# Altium PCB MC_PCB.PcbDoc
Units mil, origin at the board's own origin, x right, y up, seen from the top; angles counter-clockwise.
Board outline 2952.76 x 2755.91 mil, 2 copper layers (Top Layer, Bottom Layer); 48 components, 32 nets, 133 pads, 82 vias.
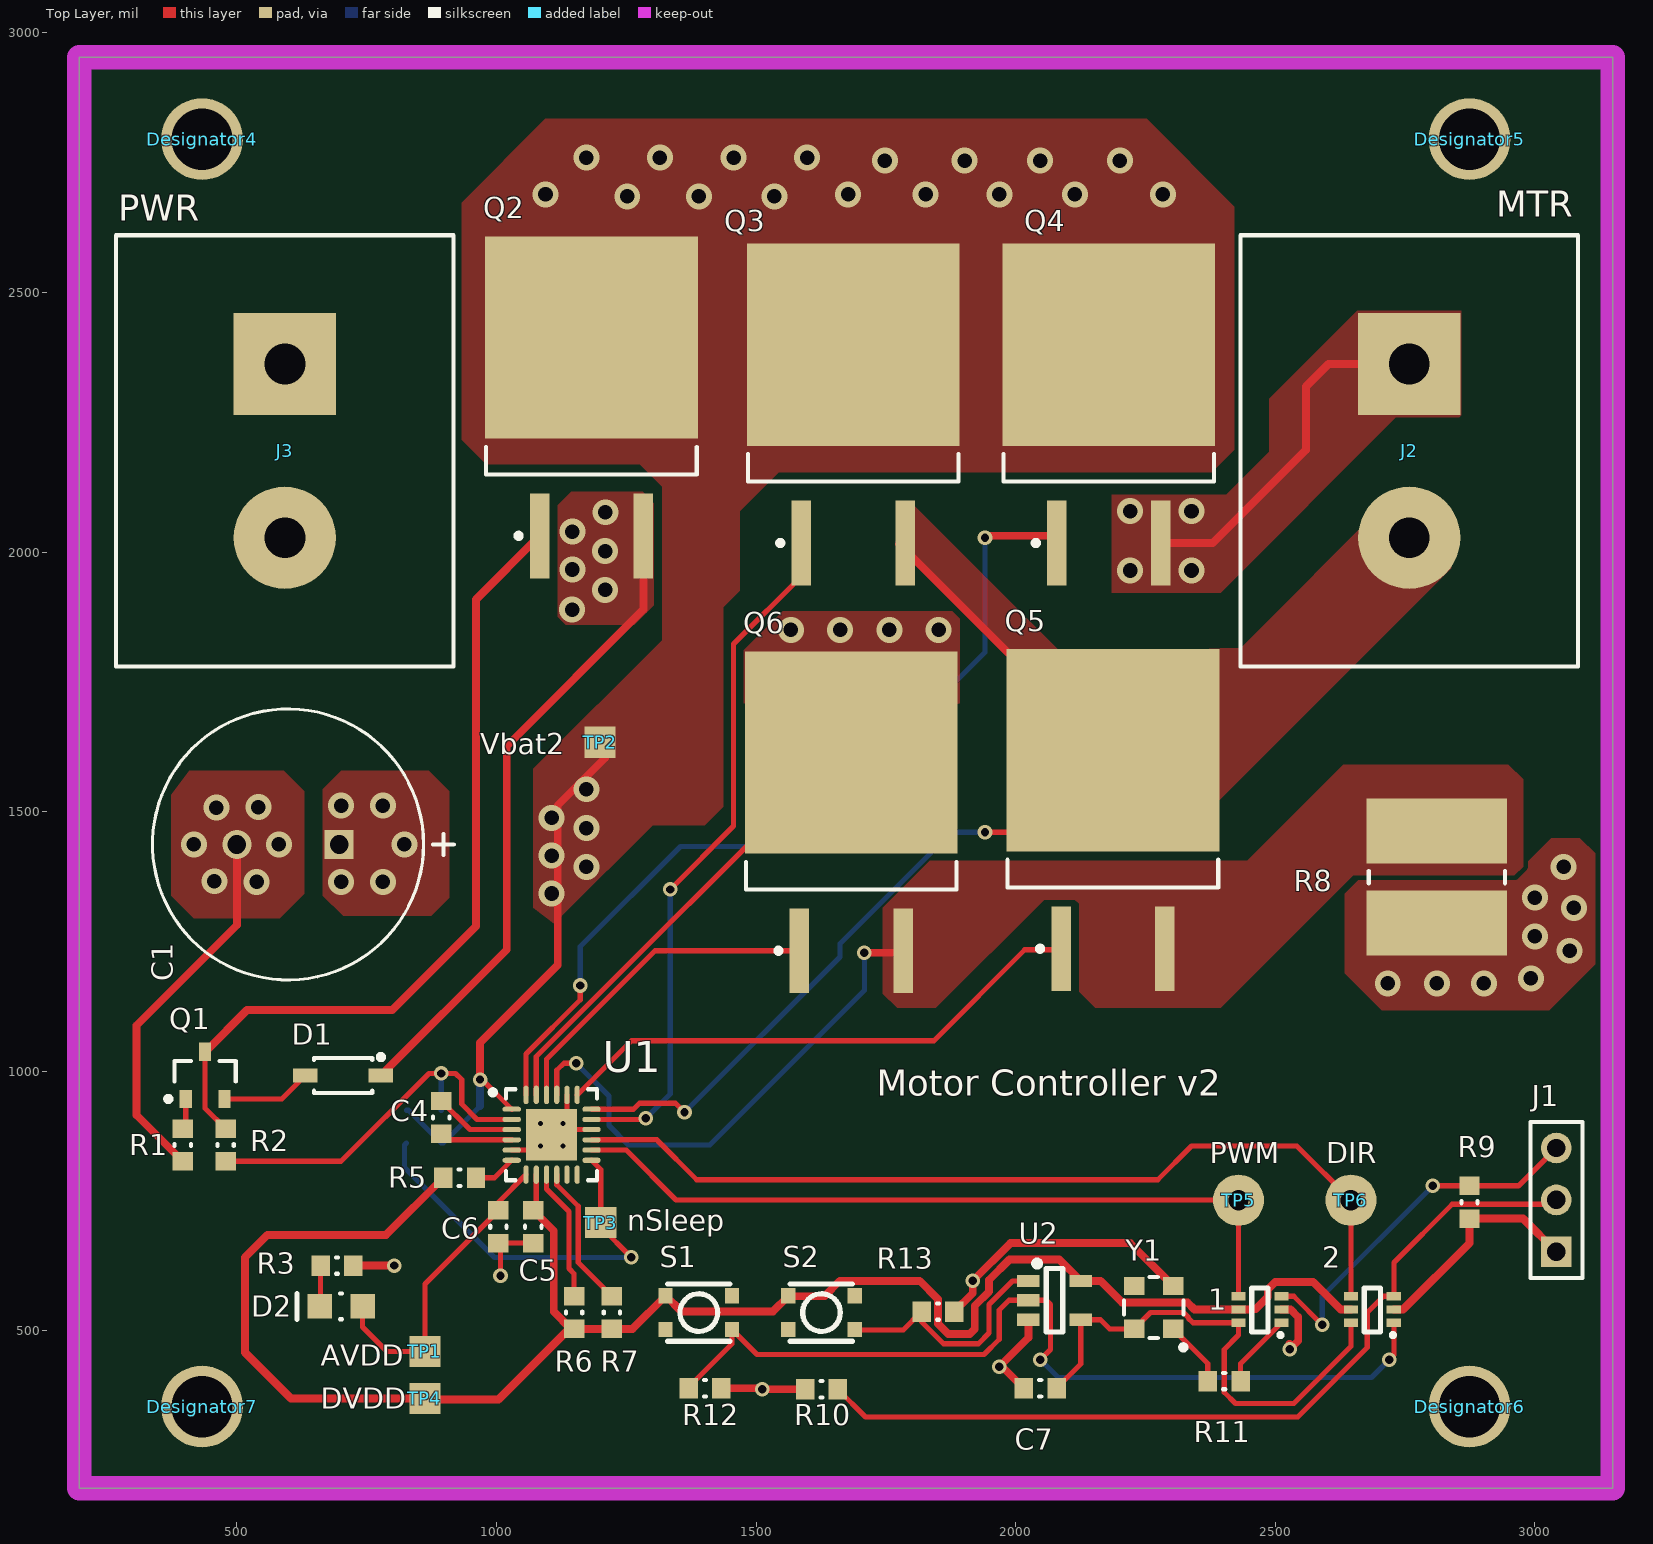
[diagram p0: Top Layer view]
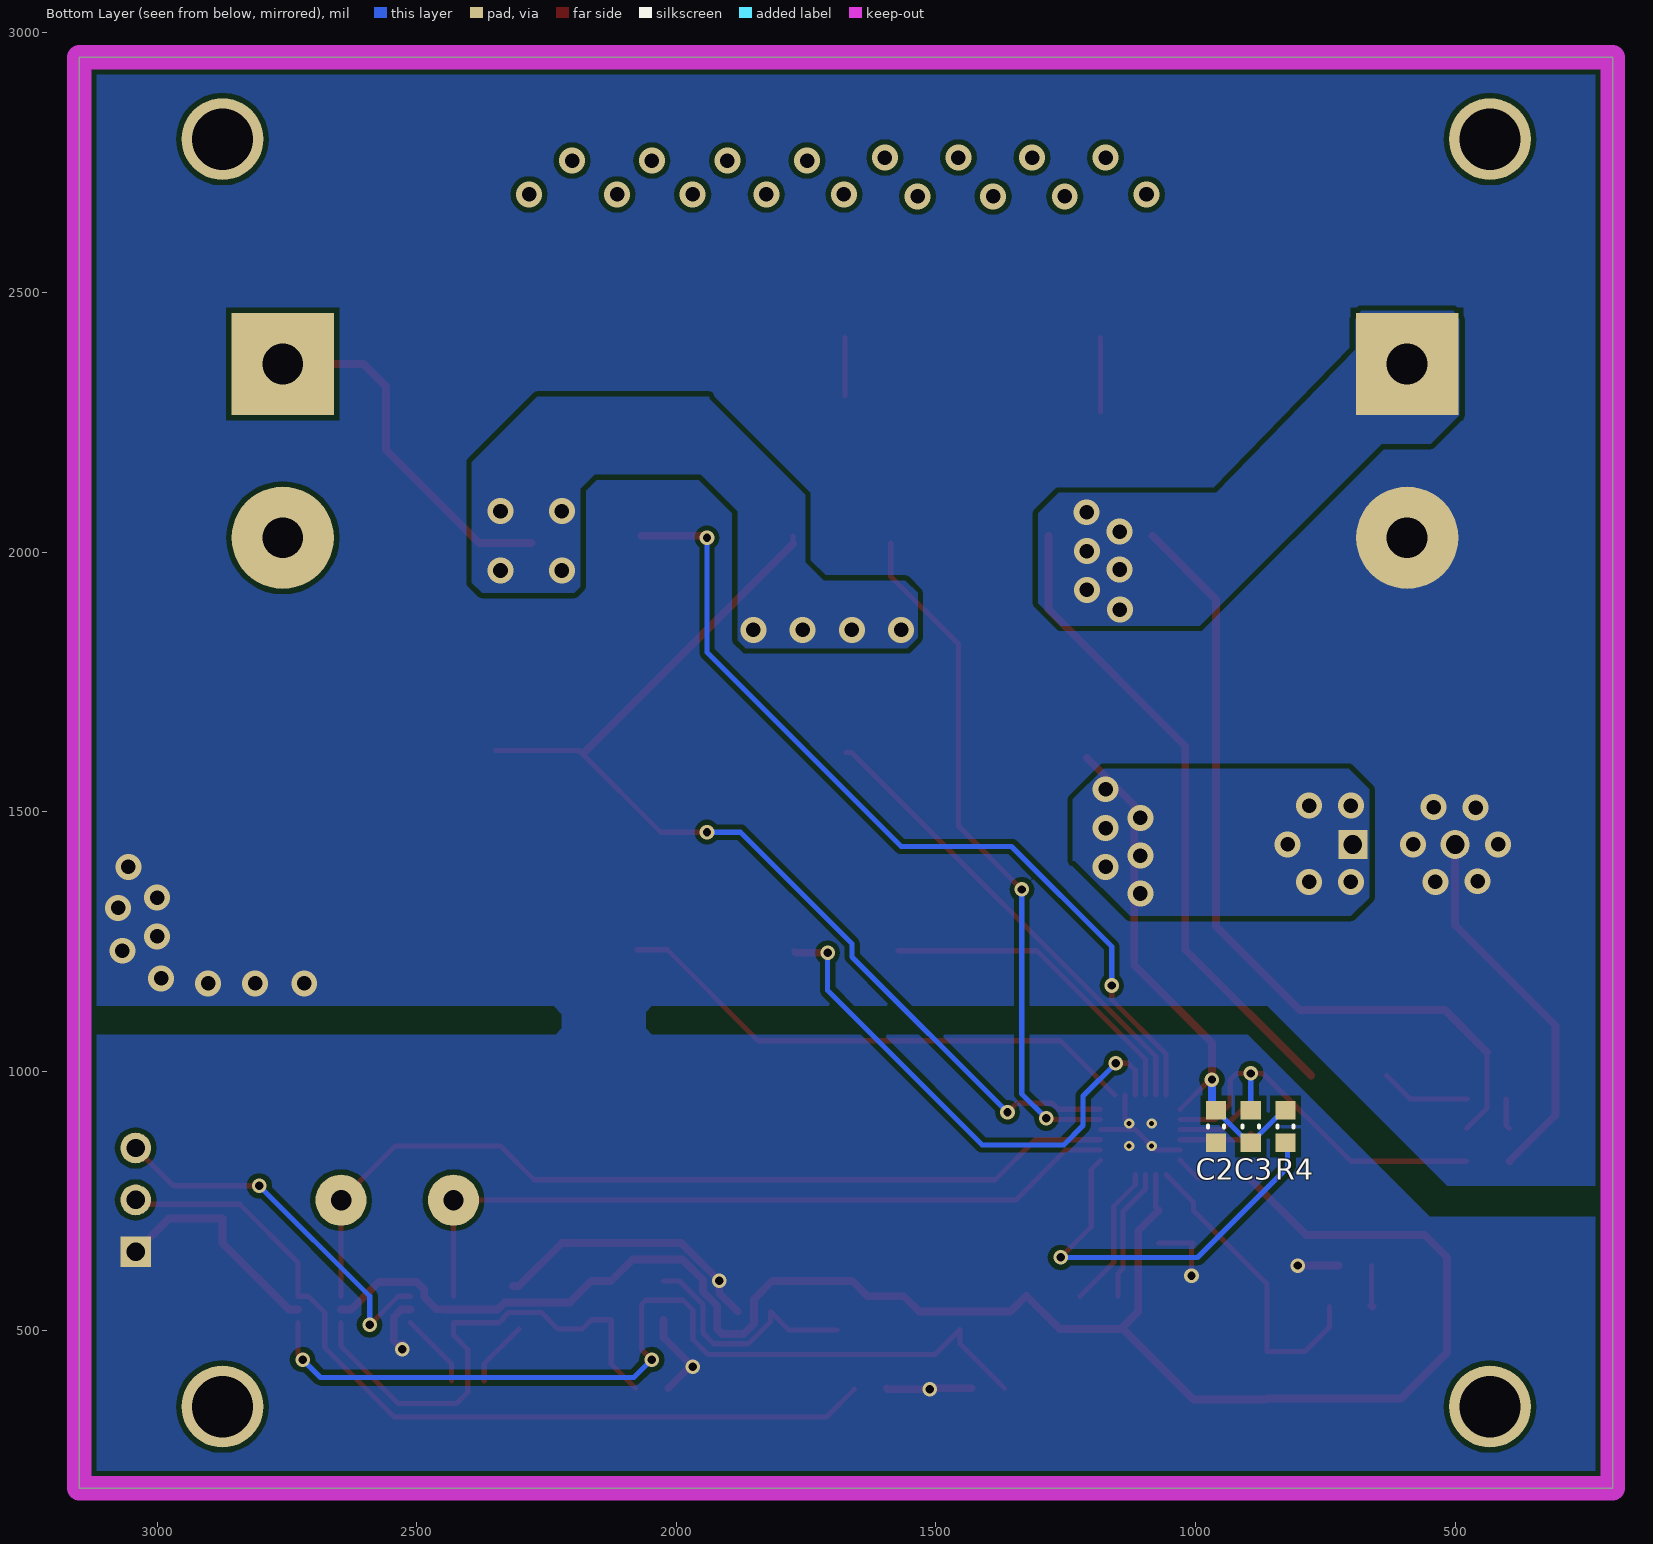
[diagram p1: Bottom Layer view, seen from below]

## Layer stack, top to bottom
Top Solder: solder mask 0.4, Solder Resist, Dk 3.5
Top Layer: signal copper 1.4
Dielectric 1: dielectric 12.6, FR-4, Dk 4.8
Bottom Layer: signal copper 1.4
Bottom Solder: solder mask 0.4, Solder Resist, Dk 3.5

## Board outline
196.85,196.85 196.85,2952.76 3149.61,2952.76 3149.61,196.85
cut-out: 479,3474.57

## Design rules (kind name [scope] priority, off if disabled: settings)
Clearance [All] p1: gap=10 ignorepadtopadclearanceinfootprint=FALSE except(0: Arc-Hole Track-Hole SMDPad-Hole THPad-Hole Via-Hole Fill-Hole Poly-Hole Region-Hole Text-Hole; 3.94: SMDPad-SMDPad; 5: Arc-Arc Arc-Track Arc-SMDPad Track-Track Track-SMDPad)
HoleSize [All] p1: absolutevalues=TRUE maxlimit=100 minlimit=10 maxpercent=80.000 minpercent=20.000
PolygonConnect [All] p1: connectstyle=Direct reliefconductorwidth=10 reliefentries=4 polygonreliefangle="90 Angle" airgapwidth=10
RoutingVias [All] p1: holewidth=28 width=50 viastyle="Through Hole" minholewidth=28 minwidth=50 maxholewidth=28 maxwidth=50
SolderMaskExpansion [All] p1: expansion=4
Width [All] p1: maxlimit=20 minlimit=10 preferedwidth=10 minimp=50.000000 maximp=50.000000 favimp=50.000000
29 further rules are at their usual default settings.

## Classes and differential pairs
component class MCMainSch: C1 C2 C3 C4 C5 C6 D1 D2 Q1 Q2 Q3 Q4 Q5 Q6 R1 R2 R3 R4 R5 R6 R7 R8 TP1 TP2 TP3 TP4 U1
component class MC_Sch2: 1 2 C7 J1 J2 J3 R9 R10 R11 R12 R13 S1 S2 TP5 TP6 U2 Y1

## Components (designator, comment, footprint, x,y, rotation, side; value= is the part's Value field where it differs from the comment)
1 "74LVC1G3157GW,125" "IC MUX/DEMUX" 2470.47,541.34 r180 top
2 "74LVC1G3157GW,125" "IC MUX/DEMUX" 2687.01,541.34 r180 top
C1 "CAP_22uF_POL" CAPR-2/4h6.8 598.65,1437.01 r180 top value=1000uF
C2 "CAP_0.1uF_16V_0603" CAPC0603(1608)55_N 960.63,893.7 r90 bottom value=0.1uF
C3 "CAP_0.1uF_16V_0603" CAPC0603(1608)55_N 893.64,893.7 r270 bottom value=0.1uF
C4 "CAP_0.1uF_16V_0603" CAPC0603(1608)55_N 893.7,911.42 r90 top value=0.1uF
C5 "CAP_1uF_16V_0603" CAPC0603(1608)55_N 1070.87,700.79 r90 top value=1uF
C6 "CAP_1uF_16V_0603" CAPC0603(1608)55_N 1003.94,700.79 r90 top value=1uF
C7 "CAP_10nF_0603" CAPC0603(1608)55_N 2047.24,389.76 r180 top value=100nF
D1 "0" DIODSOD-123 704.72,992.13 r0 top
D2 "DIO_LED_G" LED_0805_LINE 700.79,547.24 r180 top
Designator4 "Comment" MOUNTING_HOLE#1 381.89,2787.4 r0 top
Designator5 "Comment" MOUNTING_HOLE#2 2933.07,2787.4 r0 top
Designator6 "Comment" MOUNTING_HOLE#3 2933.07,338.58 r0 top
Designator7 "Comment" MOUNTING_HOLE#4 381.89,393.7 r0 top
J1 "M" HDR1X3 3041.34,652.36 r90 top
J2 "MTR" OSTYK51102030 2757.87,2194.88 r270 top
J3 "PWR" OSTYK51102030 592.52,2194.88 r270 top
Q1 "NPN_40V_100mA" SOT23-3 438.98,992.13 r90 top
Q2 "NMOS_40V_75A" SOT404 1183.07,2352.36 r90 top
Q3 "NMOS_40V_75A" SOT404 1687.01,2338.58 r90 top
Q4 "NMOS_40V_75A" SOT404 2179.13,2338.58 r90 top
Q5 "NMOS_40V_75A" SOT404 2187.4,1557.28 r90 top
Q6 "NMOS_40V_75A" SOT404 1683.46,1553.35 r90 top
R1 "RES_43K_0603" RESC0603(1608)_N 395.67,858.27 r90 top value=43K
R2 "RES_10K_0603" RESC0603(1608)_N 478.35,858.27 r90 top value=10K
R3 "RES_0R_0603" RESC0603(1608)_N 692.91,625.98 r180 top value=100R
R4 "RES_698K_0603" RESC0603(1608)_N 826.77,893.7 r90 bottom value=698K
R5 "RES_10K_0603" RESC0603(1608)_N 929.13,795.28 r0 top value=10K
R6 "RES_10K_0603" RESC0603(1608)_N 1149.61,535.43 r90 top value=10K
R7 "RES_10K_0603" RESC0603(1608)_N 1222.44,535.43 r90 top value=10K
R8 "RES_10m_2728" STAC-CSS2725-099H_V 2811.02,1374.02 r90 top value=10m
R9 "RES_10K_0603" RESC0603(1608)_N 2874.02,748.03 r90 top value=10K
R10 "RES_10K_0603" RESC0603(1608)_N 1625.98,387.8 r0 top value=10K
R11 "RES_0R_0603" RESC0603(1608)_N 2401.57,403.54 r0 top value=0R
R12 "RES_10K_0603" RESC0603(1608)_N 1401.57,389.76 r180 top value=10K
R13 "RES_10K_0603" RESC0603(1608)_N 1850.39,537.4 r180 top value=10K
S1 "SW_PWR" PTS830GM140 1389.76,535.43 r180 top
S2 "SW_PWR" PTS830GM140 1625.98,535.43 r180 top
TP1 "AVDD" TESTPOINT 862.2,460.63 r270 top
TP2 "Vbat2" TESTPOINT 1199.53,1633.86 r90 top
TP3 "nSleep" TESTPOINT 1200.79,708.66 r90 top
TP4 "DVDD" TESTPOINT 862.2,370.08 r90 top
TP5 "PWM" TESTPOINT_LOOP 2429.12,751.97 r0 top
TP6 "DIR" TESTPOINT_LOOP 2645.67,751.97 r0 top
U1 "DRV8701ERGET" VFQFPN-24_N 1106.3,877.95 r0 top
U2 "SN74AHC1G02DBVT" SOT23-5 2074.8,559.06 r0 top
Y1 "2kHz" CDFN-4 2303.15,503.94 r180 top

## Footprints (in the part's own frame and the unit in brackets; to place one, negate y for a bottom-side part, rotate by r counter-clockwise, add the part's x,y. Pads: shape width x height; smd on the part's side, far side on the other; paste and mask are expansions set on the pad)
CAPC0603(1608)55_N [mm] "Chip Capacitor, Body 1.6x0.8mm, Height 0.55mm, IPC Medium Density"
  rect 0.9x1 smd: 1(-0.8,0) 2(0.8,0)
  silkscreen extent -0.05,-0.4 0.05,0.4, body extent -0.87,-0.48 0.88,0.47, height 0.55
CAPR-2/4h6.8 [mil]
  rect 56x56 hole 36: 1(-98.5,0)
  round 56 hole 36: 2(98.5,0)
  silkscreen extent -319,-261 261,261
CDFN-4 [mm]
  rect 1x0.9 smd: 1(0,0) 2(0,-2.1) 3(1.9,-2.1) 4(1.9,0)
  silkscreen extent -0.63,-2.55 2.4,1.02
DIODSOD-123 [mm] "SOD-123, 2-Leads, Body 2.85x1.7mm (max), Pitch 3.7mm"
  rect 1.2x0.7 smd: 1(-1.85,0) 2(1.85,0)
  silkscreen extent -1.43,-0.85 1.97,1.02, body extent -1.42,-0.85 1.43,0.85, height 1.45
HDR1X3 [mm] "Connector; Header; 3 Position"
  rect 1.5x1.5 hole 0.9: 1(0,0)
  round 1.5 hole 0.9: 2(2.54,0) 3(5.08,0)
  silkscreen extent -1.27,-1.27 6.35,1.27
"IC MUX/DEMUX" [mm]
  rect 0.7x0.4 smd: 1(-1.05,0.65) 2(-1.05,0) 3(-1.05,-0.65) 4(1.05,-0.65) 5(1.05,0) 6(1.05,0.65)
  silkscreen extent -1.07,-1.05 0.4,1.32, body extent -1.05,-1 1.05,1, height 1.11
LED_0805_LINE [mm] "SMD, 2-Leads, Body 2x1.25mm"
  rect 1.2x1.2 smd: 1(-1.05,0) 2(1.05,0)
  silkscreen extent -0.05,-0.63 2.16,0.64, body extent -1,-0.63 1,0.63, height 0.8
MOUNTING_HOLE#1 [mm]
  round 4 hole 3 unplated: 0(1.3,0.2)
MOUNTING_HOLE#2 [mm]
  round 4 hole 3 unplated: 0(-1.5,0.2)
MOUNTING_HOLE#3 [mm]
  round 4 hole 3 unplated: 0(-1.5,0.4)
MOUNTING_HOLE#4 [mm]
  round 4 hole 3 unplated: 0(1.3,-1)
OSTYK51102030 [mm] "Connector; Header; 2 Position"
  rect 5x5 hole 2: 1(-4.25,0)
  round 5 hole 2: 2(4.25,0)
  silkscreen extent -10.55,-8.25 10.55,8.25
PTS830GM140 [mm] "PWR TACTILE SWITCH (RED)"
  rect 0.7x0.75 smd: 1(-1.625,0.825) 2(1.625,0.825) 3(-1.625,-0.825) 4(1.625,-0.825)
  silkscreen extent -1.53,-1.4 1.53,1.4
RESC0603(1608)_N [mm] "Chip Resistor, Body 1.6x0.8mm, IPC Medium Density"
  rect 0.9x1 smd: 1(-0.8,0) 2(0.8,0)
  silkscreen extent -0.05,-0.4 0.05,0.4, body extent -0.85,-0.47 0.85,0.47, height 0.6
SOT23-3 [mm] "SOT23, 3-Leads, Body 2.90x2.30mm, Pitch 0.95mm, IPC Medium Density"
  rect 0.9x0.6 smd: 1(-1.15,0.95) 2(-1.15,-0.95) 3(1.15,0)
  silkscreen extent -1.27,-1.5 0.7,1.92, body extent -1.3,-1.5 1.3,1.5, height 1.1
SOT23-5 [mm]
  rect 1.1x0.6 smd: 1(-1.279,0.95) 2(-1.279,0) 3(-1.279,-0.95) 4(1.279,-0.95) 5(1.279,0.95)
  silkscreen extent -0.99,-1.55 0.4,1.94, body extent -1.4,-1.45 1.4,1.45, height 1.2
SOT404 [mm]
  rect 4.15x0.95 smd: 1(-8.155,2.54) 3(-8.155,-2.54)
  rect 9.9x10.4 smd: 4(1.545,0)
  silkscreen extent -8.28,-5.15 -3.8,5.15, body extent -5.16,-5.15 4.64,5.15, height 4.5
STAC-CSS2725-099H_V [mm] "Chip Resistor, 2-Leads, Body 7.06x6.7mm"
  rect 3.18x6.86 smd: 1(-2.25,0) 2(2.25,0)
  silkscreen extent -0.3,-3.33 0.3,3.33, body extent -3.53,-3.35 3.53,3.35, height 1.24
TESTPOINT [mil]
  rect 60x60 smd: 1(0,0)
TESTPOINT_LOOP [mm]
  round 2.5 hole 1: 1(0,0)
VFQFPN-24_N [mm] "QFN, 24-Leads, Body 4x4mm, Pitch 0.5mm, Thermal Pad 2.5x2.5mm, IPC Medium Density"
  oval 0.9x0.25 smd: 1(-1.95,1.25) 2(-1.95,0.75) 3(-1.95,0.25) 4(-1.95,-0.25) 5(-1.95,-0.75) 6(-1.95,-1.25) 13(1.95,-1.25) 14(1.95,-0.75) 15(1.95,-0.25) 16(1.95,0.25) 17(1.95,0.75) 18(1.95,1.25)
  oval 0.25x0.9 smd: 7(-1.25,-1.95) 8(-0.75,-1.95) 9(-0.25,-1.95) 10(0.25,-1.95) 11(0.75,-1.95) 12(1.25,-1.95) 19(1.25,1.95) 20(0.75,1.95) 21(0.25,1.95) 22(-0.25,1.95) 23(-0.75,1.95) 24(-1.25,1.95)
  rect 2.5x2.5 smd: 25(0,0)
  silkscreen extent -3,-2.22 2.23,2.23, body extent -2.07,-2.07 2.08,2.08, height 1

## Part data
1 2: library part "IC MUX/DEMUX 2x1", Case/Package=TSSOP, Manufacturer="NXP Semiconductors", Max Operating Temperature=125°C, Max Power Dissipation=250mW, Max Supply Voltage=5.5V, Min Operating Temperature=-40°C, Min Supply Voltage=1.65V, On-State Resistance=15R, Operating Supply Current=40uA, Package Quantity=3000, Supplier Part Number 1=1727-6073-6-ND, Bandwidth=300MHz, ComponentLink1Description=http://www.nxp.com/documents/data_sheet/74LVC1G3157.pdf?src-supplier=Avnet, ComponentLink1URL=http://www.nxp.com/documents/data_sheet/74LVC1G3157.pdf?src-supplier=Avnet, ComponentLink2Description=https://www.verical.com/server-webapp/html/getDatasheet?partID=347929&src-supplier=Verical, ComponentLink2URL=https://www.verical.com/server-webapp/html/getDatasheet?partID=347929&src-supplier=Verical, ComponentLink3Description=http://www.nxp.com/documents/data_sheet/74LVC1G3157.pdf?src-supplier=Avnet+Asia, ComponentLink3URL=http://www.nxp.com/documents/data_sheet/74LVC1G3157.pdf?src-supplier=Avnet+Asia, ComponentLink4Description=http://www.nxp.com/documents/data_sheet/74LVC1G3157.pdf?src-supplier=Digi-Key, ComponentLink4URL=http://www.nxp.com/documents/data_sheet/74LVC1G3157.pdf?src-supplier=Digi-Key, ComponentLink5Description=http://www.nxp.com/documents/data_sheet/74LVC1G3157.pdf?src-supplier=Avnet+Europe, ComponentLink5URL=http://www.nxp.com/documents/data_sheet/74LVC1G3157.pdf?src-supplier=Avnet+Europe, Lead Free="Lead Free", Logic Function=Demultiplexer,Demux,Multiplexer,Mux, Manufacturer Part Number=74LVC1G3157GW,125, Mount="Surface Mount", Number of Channels=1, Number of Circuits=1, Number of Inputs=2, Number of Outputs=1, Number of Pins=6, Packaging="Tape and Reel", Power Dissipation=250mW, Pricing 1="1=0.37, 10=0.276, 100=0.156, 500=0.10332, 1000=0.07921 (USD)", Propagation Delay=1ns, Radiation Hardening=No, REACH SVHC="No SVHC", Stock 1=109219, Supplier 1=Digi-Key, Supply Type=Single, Turn-Off Delay Time=6ns, Turn-On Delay Time=8.7ns
C1: "CAP ALUM 22UF 20% 50V RADIAL", Digikey Part Number=732-8857-1-ND, Manufacturer="Wurth Electronics Inc.", MPN=860020672011, Tolerance=20%, Voltage Rating=50V
C2 C3 C4: "CAP CER 0.1UF 16V X7R 0603", Digikey Part Number=311-1088-1-ND, Manufacturer=Yageo, MPN=CC0603KRX7R7BB104, Package="0603 (1608 Metric)", Temperature Coefficient=X7R, Voltage Rating=16V, Dimensions="0.063\" L x 0.031\" W (1.60mm x 0.80mm)"
C5 C6: "CAP CER 1UF 16V Y5V 0603", Digikey Part Number=311-1372-1-ND, Manufacturer=Yageo, MPN=CC0603ZRY5V7BB105, Package="0603 (1608 Metric)", Temperature Coefficient=Y5V, Voltage Rating=16V, Dimensions="0.063\" L x 0.031\" W (1.60mm x 0.80mm)"
C7: "CAP CER 10000PF 16V X7R 0603", Digikey Part Number=311-3369-1-ND, Manufacturer=Yageo, MPN=CC0603KRX7R7BB103, Package="0603 (1608 Metric)", Temperature Coefficient=X7R, Voltage Rating=16V, Dimensions="0.063\" L x 0.031\" W (1.60mm x 0.80mm)"
D1: library part DIO_BAS16GW, "ESD PROTECTION DIODE", Digikey Part Number=1727-7320-1-ND, Manufacturer=Nexperia, MPN=BAS16GW, Package=SOD-123, ComponentLink1Description=Datasheet, ComponentLink1URL=https://assets.nexperia.com/documents/data-sheet/BAS16GW.pdf, Supplier 1=Digi-Key, Supplier Part Number 1=1727-7320-1-ND
D2: "LED GREEN DIFFUSED 0805 SMD", Digikey Part Number=475-1410-1-ND, Forward Voltage Drop=2.2V, Manufacturer=OSRAM, MPN="LG R971-KN-1", Package="0805 (2012 Metric)"
J1: library part "Header 3", "Header, 3-Pin", LatestRevisionDate=17-Jul-2002, LatestRevisionNote="Re-released for DXP Platform.", Publisher="Altium Limited"
J2 J3: library part TERMINAL_2, "Header, 2-Pin", LatestRevisionDate=17-Jul-2002, LatestRevisionNote="Re-released for DXP Platform.", Publisher="Altium Limited"
Q1: "TRANS NPN 40V 0.2A SOT23", Digikey Part Number=MMBT3904TPMSCT-ND, Manufacturer="Micro Commercial Co", MPN=MMBT3904-TP, Package="TO-236-3, SC-59, SOT-23-3", ComponentLink1Description=Datasheet, ComponentLink1URL=http://www.mccsemi.com/up_pdf/MMBT3904(SOT-23).pdf
Q2 Q3 Q4 Q5 Q6: "MOSFET N-CH 40V 75A D2PAK", Digikey Part Number=1727-7257-1-ND, Manufacturer="Nexperia USA Inc.", MPN=BUK768R1-40E,118, Package="TO-263-3, D²Pak (2 Leads + Tab), TO-263AB", Supplier Part Number 1=1727-7255-1-ND, ComponentLink1Description=Datasheet, ComponentLink1URL=http://aosmd.com/res/data_sheets/AO3420.pdf, Supplier 1=Digi-Key
R1: "RES SMD 43K OHM 5% 1/10W 0603", Digikey Part Number=311-43KGRCT-ND, Manufacturer=Yageo, MPN=RC0603JR-0743KL, Package="0603 (1608 Metric)", Tolerance=5%, Dimensions="0.063\" L x 0.031\" W (1.60mm x 0.80mm)"
R2 R5 R6 R7 R9 R10 R12 R13: "RES SMD 10K OHM 5% 1/10W 0603", Digikey Part Number=311-10KGRCT-ND, Manufacturer=Yageo, MPN=RC0603JR-0710KL, Package="0603 (1608 Metric)", Tolerance=5%, Dimensions="0.063\" L x 0.031\" W (1.60mm x 0.80mm)"
R3 R11: "RES SMD 0 OHM JUMPER 1/10W 0603", Digikey Part Number=311-0.0GRCT-ND, Manufacturer=Yageo, MPN=RC0603JR-070RL, Package="0603 (1608 Metric)", Dimensions="0.063\" L x 0.031\" W (1.60mm x 0.80mm)"
R4: "RES SMD 698K OHM 1% 1/10W 0603", Digikey Part Number=311-698KHRCT-ND, Manufacturer=Yageo, MPN=RC0603FR-07698KL, Package="0603 (1608 Metric)", Tolerance=1%, Dimensions="0.063\" L x 0.031\" W (1.60mm x 0.80mm)"
R8: "RES SMD 10mOHM 1% 4W 2728", Digikey Part Number=CSSH2728FT10L0DKR-ND, Manufacturer=Yageo, MPN=RC0603FR-07698KL, Package="0603 (1608 Metric)", Tolerance=1%, Dimensions="0.063\" L x 0.031\" W (1.60mm x 0.80mm)", Supplier 1=Digi-Key
S1 S2: "Power Switch (Red)", Digikey Part Number=CKN10587CT-ND, Manufacturer=C&K, MPN="PTS830GM140 SMTR LFS", ComponentLink1Description=Datasheet, ComponentLink1URL=https://www.ckswitches.com/media/1478/pts830.pdf
TP1 TP2 TP3 TP4 TP5 TP6: library part *, "TESTPOINT_SMD"
U1: library part "IC Motor Driver", Case/Package=VQFN, Manufacturer="Texas Instruments", Max Operating Temperature=125°C, Min Operating Temperature=-40°C, Supplier Part Number 1=296-42155-1-ND, Interface=Parallel, Lead Free="Lead Free", Manufacturer Part Number=DRV8701ERGET, Mount="Surface Mount", Packaging="Tape and Reel", Pricing 1="1=2.83, 10=2.541, 100=2.0425 (USD)", Stock 1=17098, Supplier 1=Digi-Key
U2: library part "IC GATE XOR", Case/Package=SOT-23, High Level Output Current=-8mA, Low Level Output Current=8mA, Manufacturer="Texas Instruments", Max Operating Temperature=125°C, Max Supply Voltage=5.5V, Min Operating Temperature=-40°C, Min Supply Voltage=2V, Package Quantity=250, Quiescent Current=1uA, Supplier Part Number 1=296-1094-1-ND, ComponentLink1Description=http://www.ti.com/lit/ds/symlink/sn74ahc1g02.pdf?src-supplier=Digi-Key, ComponentLink1URL=http://www.ti.com/lit/ds/symlink/sn74ahc1g02.pdf?src-supplier=Digi-Key, ComponentLink2Description=http://focus.ti.com/lit/ds/symlink/sn74ahc1g02.pdf?src-supplier=Avnet+Europe, ComponentLink2URL=http://focus.ti.com/lit/ds/symlink/sn74ahc1g02.pdf?src-supplier=Avnet+Europe, ComponentLink3Description=http://www.farnell.com/datasheets/1786933.pdf?src-supplier=Element14, ComponentLink3URL=http://www.farnell.com/datasheets/1786933.pdf?src-supplier=Element14, Lead Free="Lead Free", Logic Function=NOR, Manufacturer Part Number=SN74AHC1G02DBVT, Max Output Current=8mA, Mount="Surface Mount", Number of Bits=1, Number of Circuits=1, Number of Elements=1, Number of Gates=1, Number of Input Lines=2, Number of Inputs=2, Number of Output Lines=1, Number of Outputs=1, Number of Pins=5, Output Current=8mA, Packaging="Tape and Reel", Propagation Delay=7.5ns, Radiation Hardening=No, REACH SVHC="No SVHC", Supplier 1=Digi-Key, Termination=SMD/SMT, Turn-On Delay Time=8.5ns, Weight=0.000557oz
Y1: library part OSC_2kHz, "OSCILLATOR_2kHz", Supplier Part Number 1=DSC6083CI2A-002K000-ND, Supplier 1=Digi-Key

## Via types
v1: diameter 50, hole 28, Top Layer to Bottom Layer, 57 vias
v2: diameter 28, hole 16, Top Layer to Bottom Layer, 21 vias
v3: diameter 20, hole 10, Top Layer to Bottom Layer, 4 vias

## Nets (pads, with @x,y where several pads share a name; then routed paths per layer and width w, separated by ;. In a path a pad name is that pad's centre, name@x,y a point inside that pad or via, vN(x,y) a via of type N, cw(c..) or ccw(c..) an arc to the next point about the centre after c; other vN are vias at no path point)
AVDD: C6.2 D2.1 TP1.1 U1.7 | length 600.3
  Top Layer w10: D2.1 742.13,507.87 789.37,460.63 TP1.1 862.2,590.55 C6.2 1003.94,748.03 U1.7
DVDD: 1.5 2.5 C5.2 R5.1 R6.1 R7.1 S1.4 S2.4 TP4.1 U1.8 U2.5 | length 3507.2
  Top Layer w10: C5.2 1076.77,738.19 U1.8
  Top Layer w15: R5.1 787.4,685.04 559.06,685.04 515.75,641.73 515.75,458.66 604.33,370.08 TP4.1 864.17,368.11 1003.94,368.11 1139.76,503.94 R6.1@1143.7,503.94 ; C5.2 1110.24,692.91 1110.24,537.4 R6.1@1143.7,503.94 ; 2.5 2625.99,541.33 2572.83,594.49 2500.04,594.49 2485.53,579.98 2485.53,565.48 2461.81,541.75 2448.81,541.75 2448.81,541.33 1.5 2344.5,541.33 2330.71,555.12 2204.72,555.12 2163.39,596.46 U2.5 2083.82,637.8 1988.19,637.8 1948.82,598.43 1948.82,576.05 1921.26,548.49 1921.26,503.94 1911.42,494.09 1870.08,494.09 1850.39,513.78 1850.39,561.02 1814.96,596.46 1661.42,596.46 1631.89,566.93 1562.01,566.93 1532.48,537.4 1356.3,537.4 S1.4 1261.81,503.94 R7.1 R6.1 R6.1@1143.7,503.94
GND: 1.2 2.2 C1.2 C2.1 C5.1 C6.1 C7.2 J1.1 J3.2 R1.1 R3.1 R8.1 R9.1 R10.1 R12.1 R13.1 U1.5 U1.16 U1.20 U1.25 U2.3 Y1.2 | length 2580.2
  Top Layer w10: v2(1007.87,606.3) 1007.87,665.35 C6.1 C5.1 ; U1.5 U1.25@1076.77,848.43 ; v3(1084.65,856.3) U1.25 1116.14,887.8 U1.16 ; U1.25@1135.83,907.48 U1.20
  Top Layer w15: R1.1 307.09,915.35 307.09,1088.58 500.15,1281.64 C1.2 ; R3.1 v2(803.15,625.98) ; R12.1@1431.1,389.76 1509.84,389.76 v2(1511.81,387.8) 1592.52,387.8 R10.1@1594.49,389.76 ; R13.1 1917.32,572.83 v2(1917.32,596.46) 1990.16,669.29 2220.47,669.29 Y1.2 Y1.2@2314.96,586.61 ; v2(1968.5,431.1) v2@1974.41,431.1 ; C7.2 v2@1974.41,431.1 ; U2.3 2024.45,487.05 1971.46,434.06 v2@1974.41,431.1 ; 1.2 2529.54,541.33 2544.13,526.73 2544.13,481.14 v2(2527.56,464.57) v2@2527.56,475.47 ; 2.2 2746.06,541.33 2874.02,669.28 R9.1 2977.17,716.54 J1.1
  other v1: 2716.54,1169.29 2811.02,1169.29 2901.57,1169.29 2992.13,1179.21 3066.93,1232.28 3000,1259.84 3074.8,1314.96 3000,1334.65 538.34,1365.08 456.69,1366.14 3055.12,1393.7 417.32,1437.01 580.93,1437.01 460.63,1507.87 541.56,1508.94
  other v3: 1127.95,856.3 1084.65,899.61 1127.95,899.61
Net1_1: 1.1 R11.2 | length 144.8
  Top Layer w10: R11.2 2433.07,437.01 1.1
Net1_3: 1.3 J1.3 R9.2 | length 725.7
  Top Layer w10: 1.3 2535.43,566.93 v2(2590.55,511.81) ; v2(2803.15,779.53) R9.2 2968.5,779.53 J1.3
  Bottom Layer w10: v2(2590.55,511.81) 2590.55,566.93 v2(2803.15,779.53)
Net1_4: 1.4 TP5.1 U1.14 | length 1493
  Top Layer w10: U1.14 1250,848.43 1346.06,752.36 2413.78,752.36 2429.12,767.71 1.4
Net1_6: 1.6 2.6 C7.1 U2.4 Y1.4 | length 973.6
  Top Layer w10: C7.1 2125.16,436.18 U2.4 2163.39,521.65 2181.1,503.94 Y1.4 2259.84,535.43 2323.2,535.43 2332.83,525.8 2332.83,524.29 2341.38,515.75 1.6 2429.12,492.12 2401.57,464.57 2401.57,381.89 2423.07,360.39 2535.57,360.39 2645.66,470.49 2.6
Net2_1: 2.1 R12.2 S1.1 U2.2 | length 1751.2
  Top Layer w10: R12.2@1368.11,389.76 1453.74,475.39 S1.1 1501.97,454.72 1938.98,454.72 1968.5,484.25 1968.5,540.35 1987.2,559.06 U2.2 2059.06,559.06 2066.93,551.18 2066.93,464.57 v2(2047.24,444.88) ; v2(2719.64,444.88) 2728.35,453.59 2.1
  Bottom Layer w10: v2(2047.24,444.88) 2081.85,410.28 2685.04,410.28 v2(2719.64,444.88)
Net2_3: 2.3 J1.2 R10.2 | length 1656.2
  Top Layer w10: R10.2 1710.63,334.65 2543.31,334.65 2677.17,468.5 2677.17,535.43 2708.66,566.93 2.3 2728.35,631.89 2840.71,744.25 3033.23,744.25 J1.2
Net2_4: 2.4 TP6.1 U1.15 | length 1749.6
  Top Layer w10: U1.15 1309.06,868.11 1385.83,791.34 2273.62,791.34 2338.58,856.3 2541.34,856.3 TP6.1 2.4
NetC1_1: C1.1 C2.2 C3.2 Q2.4 Q3.4 Q4.4 R4.2 TP2.1 U1.1 | length 1322.6
  Top Layer w10: C1.1 C1.1@710.63,1437.01 ; v2(968.5,984.25) 972.44,984.25 U1.1 ; Q2.4@1183.07,2269.68 Q2.4 ; 1209.33,1603.66 TP2.1@1210.31,1604.65 ; Q3.4@1675.2,2301.18 Q3.4@1675.2,2413.19
  Top Layer w15: v2(968.5,984.25) 968.5,1055.12 1118.11,1204.72 1118.11,1512.44 1209.33,1603.66
  Bottom Layer w10: R4.2 830.64,925.2 C3.2 897.64,862.2 C2.2 C2.2@968.5,933.07
  Bottom Layer w15: C2.2@968.5,933.07 v2(968.5,984.25)
  other v1: 1106.3,1342.52 700.79,1365.08 781.5,1365.08 1173.23,1393.7 1106.3,1415.35 822.83,1437.01 1173.23,1468.5 1106.3,1488.19 700.79,1511.81 781.5,1511.81 1173.23,1543.31 1251.97,2685.04 1389.76,2685.04 1535.43,2685.04 1094.49,2688.98 1677.17,2688.98 1826.77,2688.98 1968.5,2688.98 2114.17,2688.98 2283.46,2688.98 1748.03,2753.94 1901.57,2753.94 2047.24,2753.94 2200.79,2753.94 1173.23,2759.84 1314.96,2759.84 1456.69,2759.84 1598.43,2759.84
NetC3_1: C3.1 R2.1 U1.2 | length 756.6
  Top Layer w10: R2.1 700.79,826.77 870.08,996.06 v2(893.7,996.06) 921.26,996.06 933.07,984.25 933.07,937.01 962.6,907.48 U1.2
  Bottom Layer w10: C3.1 893.64,996 v2(893.7,996.06)
NetC4_1: C4.1 U1.4 | length 140.7
  Top Layer w10: C4.1 905.51,868.11 U1.4
NetC4_2: C4.2 U1.3 | length 158.7
  Top Layer w10: C4.2 948.82,887.8 U1.3
NetD1_1: D1.1 Q1.2 | length 174.3
  Top Layer w10: Q1.2 586.61,946.85 D1.1
NetD1_2: D1.2 J3.1 Q2.3 | length 1248.6
  Top Layer w15: D1.2 1019.68,1234.25 1019.68,1625.98 1283.07,1889.37 Q2.3
  other v1: 1145.67,1889.37 1209.33,1927.17 1146.34,1966.54 1209.33,2001.97 1146.34,2039.37 1210,2076.77
NetD2_2: D2.2 R3.2 | length 79.6
  Top Layer w10: D2.2@661.42,549.21 R3.2
  Top Layer w15: D2.2 D2.2@661.42,549.21
NetJ2_1: J2.1 Q4.3 Q6.4 U1.23 | length 1605.8
  Top Layer w10: U1.23 1076.77,1028.36 1662.59,1614.17 Q6.4@1673.23,1614.17
  Top Layer w15: Q4.3 2379.72,2017.52 2559.06,2196.85 2559.06,2318.9 2602.36,2362.2 J2.1
  other v1: 1566.93,1850.39 1661.86,1850.39 1756.8,1850.39 1851.73,1850.39 2220.47,1964.57 2338.58,1964.57 2220.47,2078.74 2338.58,2078.74
NetJ2_2: J2.2 Q3.3 Q5.4 U1.18 | length 2069.6
  Top Layer w10: U1.18 1264.11,927.17 1275.39,938.45 1345.02,938.45 v2(1362.2,921.26) v2@1354.33,921.26 ; Q3.3@1775.2,2015.94 Q3.3@1775.2,2031.3 ; v2(1940.94,1460.63) 2029.92,1460.63 Q5.4 Q5.4@2348.43,1618.11
  Top Layer w15: Q3.3@1775.2,2015.94 Q5.4@2175.2,1615.94
  Bottom Layer w10: v2(1362.2,921.26) 1661.42,1220.47 1661.42,1245.93 1876.12,1460.63 v2(1940.94,1460.63)
NetQ1_1: Q1.1 R1.2 | length 59.5
  Top Layer w10: R1.2 401.57,895.67 Q1.1
NetQ1_3: Q1.3 Q2.1 R2.2 | length 1588.4
  Top Layer w10: Q1.3 438.98,929.13 R2.2
  Top Layer w15: Q1.3 519.69,1118.11 799.21,1118.11 960.63,1279.53 960.63,1908.86 Q2.1
NetQ3_1: Q3.1 U1.17 | length 1337.3
  Top Layer w10: U1.17 1285.43,907.48 v2(1287.4,909.45) ; v2(1334.65,1350.39) 1456.69,1472.44 1456.69,1822.83 1587.01,1953.15 Q3.1
  Bottom Layer w10: v2(1287.4,909.45) 1334.65,956.69 v2(1334.65,1350.39)
NetQ4_1: Q4.1 U1.24 | length 1691.4
  Top Layer w10: U1.24 1057.09,1033.42 1161.42,1137.75 v2(1161.42,1165.35) ; v2(1940.94,2027.56) v2@1944.68,2031.3
  Top Layer w15: v2@1944.68,2031.3 Q4.1@2067.32,2031.3
  Bottom Layer w10: v2(1161.42,1165.35) 1161.42,1240.16 1354.33,1433.07 1566.93,1433.07 1940.94,1807.09 v2(1940.94,2027.56)
NetQ5_1: Q5.1 U1.19 | length 1035.4
  Top Layer w10: U1.19 1259.84,1059.06 1842.52,1059.06 2017.52,1234.06 Q5.1@2075.2,1234.06
NetQ5_3: Q5.3 Q6.3 R8.2 U1.21 | length 1005.9
  Top Layer w10: U1.21 1116.14,1001.97 1129.92,1015.75 v2(1153.54,1015.75) ; Q6.3@1769.29,1228.35 Q6.3@1773.23,1232.28
  Top Layer w15: v2(1708.66,1228.35) Q6.3@1769.29,1228.35
  Bottom Layer w10: v2(1153.54,1015.75) 1216.54,952.76 1216.54,895.67 1253.94,858.27 1410.79,858.27 1708.66,1156.14 v2(1708.66,1228.35)
NetQ6_1: Q6.1 U1.22 | length 631.9
  Top Layer w10: U1.22 1096.46,1023.3 1305.44,1232.28 Q6.1@1573.23,1232.28
NetR4_1: R4.1 TP3.1 U1.13 | length 776.4
  Top Layer w10: U1.13 1200.79,811.02 TP3.1 1200.79,700.79 v2(1259.84,641.73)
  Bottom Layer w10: R4.1 822.83,858.27 822.83,814.96 996.06,641.73 v2(1259.84,641.73)
NetR5_2: R5.2 U1.6 | length 82.8
  Top Layer w10: R5.2 996.06,795.28 U1.6
NetR6_2: R6.2 U1.9 | length 256.3
  Top Layer w10: U1.9 1096.46,773.62 1139.76,730.31 1139.76,620.08 1149.61,610.24 R6.2
NetR7_2: R7.2 U1.10 | length 278.3
  Top Layer w10: U1.10 1116.14,781.5 1157.48,740.16 1157.48,631.89 R7.2
NetR11_1: R11.1 Y1.1 | length 128.1
  Top Layer w10: Y1.1 2370.08,437.01 R11.1
NetR13_2: R13.2 S2.1 U2.1 | length 468.8
  Top Layer w10: S2.1@1689.96,501.97 1783.46,501.97 R13.2 1818.9,517.72 1861.22,475.39 1928.15,475.39 1948.82,496.06 1948.82,551.18 1994.09,596.46 U2.1
pads on no net: Designator4.0 Designator5.0 Designator6.0 Designator7.0 S1.2 S1.3 S2.2 S2.3 U1.11 U1.12 Y1.3

## Polygon pours and split planes (outlines as drawn)
GND on Bottom Layer "Bottom Layer-GND" (solid, pour order 76): 230.76,1850.39 230.76,779.53 515.75,779.53 862.2,1125.98 1637.8,1125.98 2047.24,1125.98 2059.06,1114.17 2059.06,1082.68 2047.24,1070.87 899.21,1070.87 548.81,720.47 230.76,720.47 230.76,230.76 3115.69,230.76 3115.69,1070.87 2232.28,1070.87 2220.47,1082.68 2220.47,1110.24 2236.22,1125.98 3115.69,1125.98 3115.69,2918.84 230.76,2918.84
no net on Bottom Layer "Bottom Layer-No Net 6" (solid, pour order 74): 230.76,2918.84
no net on Bottom Layer "Bottom Layer-No Net 7" (solid, pour order 70): 196.85,2940.94
no net on Bottom Layer "Bottom Layer-No Net 4" (solid, pour order 62): 562.99,1507.87
no net on Bottom Layer "Bottom Layer-No Net 5" (solid, pour order 60): 551.18,1366.14
NetC1_1 on Bottom Layer "Bottom Layer-NetC1_1" (solid, pour order 48): 704.72,1582.68 1177.17,1582.68 1236.22,1523.62 1236.22,1405.51 1232.28,1405.51 1125.98,1299.21 700.79,1299.21 665.35,1334.65 665.35,1543.31
NetD1_2 on Bottom Layer "Bottom Layer-NetD1_2" (solid, pour order 40): 1303.15,1988.19 1303.15,1901.57 1259.84,1858.27 992.13,1858.27 641.73,2208.66 547.24,2208.66 492.13,2263.78 492.13,2448.82 503.94,2464.57 681.1,2464.57 692.91,2448.82 692.91,2389.76 960.63,2114.17 1263.78,2114.17 1303.15,2074.81
no net on Bottom Layer "Bottom Layer-No Net 3" (solid, pour order 50): 196.85,196.85
no net on Bottom Layer "Bottom Layer-No Net 2" (solid, pour order 42): 1114.17,1948.82
NetJ2_1 on Bottom Layer "Bottom Layer-NetJ2_1" (solid, pour order 36): 1535.43,1834.65 1555.12,1814.96 1866.14,1814.96 1881.89,1830.71 1881.89,2078.74 1952.76,2149.61 2157.48,2149.61 2185.04,2122.05 2185.04,1933.07 2196.85,1921.26 2374.02,1921.26 2393.7,1940.94 2393.7,2173.23 2267.72,2299.21 1937.01,2299.21 1937.01,2295.28 1751.97,2110.24 1751.97,1980.32 1716.54,1944.88 1559.06,1944.88 1535.43,1921.26
no net on Bottom Layer "Bottom Layer-No Net" (solid, pour order 16): 433.07,2834.65
no net on Bottom Layer "Bottom Layer-No Net 1" (solid, pour order 12): 188.98,2948.82
NetC1_1 on Top Layer "Top Layer-NetC1_1 1" (solid, pour order 46): 665.35,1543.31 700.79,1578.74 870.08,1578.74 909.45,1539.37 909.45,1334.65 874.02,1299.21 704.72,1299.21 665.35,1338.58
NetD1_2 on Top Layer "Top Layer-NetD1_2" (solid, pour order 44): 1265.21,1859.7 1303.15,1897.64 1303.15,2094.49 1281.5,2116.14 1143.7,2116.14 1118.11,2090.55 1118.11,1875.45 1133.86,1859.7
NetC1_1 on Top Layer "Top Layer-NetC1_1" (solid, pour order 10): 1125.98,1299.21 1111.22,1284.45 1070.87,1314.96 1070.87,1582.68 1318.9,1830.71 1318.9,2125.98 1275.59,2169.29 980.32,2169.29 933.07,2216.54 933.07,2673.23 1094.49,2834.65 2251.97,2834.65 2421.26,2665.35 2421.26,2196.85 2377.95,2153.54 1543.31,2153.54 1468.5,2078.74 1468.5,1925.2 1437.01,1893.7 1437.01,1509.84 1401.57,1474.41 1301.18,1474.41
NetJ2_2 on Top Layer "Top Layer-NetJ2_2" (solid, pour order 38): 1987.99,1803.15 1795.28,1995.87 1795.28,2098.43 2007.87,1885.83 2090.55,1803.15
NetJ2_2 on Top Layer "Top Layer-NetJ2_2 1" (solid, pour order 34): 2563.41,1972.44
NetJ2_2 on Top Layer "Top Layer-NetJ2_2 2" (solid, pour order 32): 2393.7,1814.96 2433.07,1814.96 2716.54,2098.43 2838.58,1976.38 2838.58,1968.5 2330.71,1460.63 2309.47,1481.87 2309.47,1811.02
NetJ2_1 on Top Layer "Top Layer-NetJ2_1 1" (solid, pour order 30): 2185.04,1921.26 2394.53,1921.26 2394.53,1922.09 2732.28,2259.84 2854.33,2259.84 2858.27,2263.78 2858.27,2464.57 2657.48,2464.57 2488.19,2295.28 2488.19,2192.91 2405.51,2110.24 2185.04,2110.24
NetJ2_1 on Top Layer "Top Layer-NetJ2_1" (solid, pour order 6): 1476.38,1811.02 1551.18,1885.83 1877.95,1885.83 1892.44,1871.34 1892.44,1707.4 1889.76,1704.72 1885.83,1708.66 1476.38,1708.66
GND on Top Layer "Top Layer-GND" (solid, pour order 28): 374.02,1532.63 374.02,1338.58 417.32,1295.28 582.68,1295.28 629.92,1342.52 629.92,1539.37 590.55,1578.74 408.03,1578.74
no net on Top Layer "Top Layer-No Net" (solid, pour order 26): 740.16,1200.79
GND on Top Layer "Top Layer-GND 1" (solid, pour order 22): 2633.86,1188.98 2704.72,1118.11 3027.56,1118.11 3125.98,1216.54 3125.98,1409.45 3086.61,1448.82 3031.5,1448.82 2952.76,1370.08 2662.24,1370.08 2633.86,1341.69
NetQ5_3 on Top Layer "Top Layer-NetQ5_3" (solid, pour order 18): 2445.67,1405.51 1834.65,1405.51 1744.09,1314.96 1744.09,1149.61 1771.65,1122.05 1846.46,1122.05 2055.12,1330.71 2114.17,1330.71 2122.05,1322.83 2122.05,1153.54 2153.54,1122.05 2394.53,1122.05 2650.43,1377.95 2960.63,1377.95 2977.17,1394.49 2977.17,1562.2 2948.82,1590.55 2630.71,1590.55

## Keep-outs
Keep-Out Layer:
  the board outline again, w47.24

## Silkscreen, mask and mechanical layers (free items; w line width, h text height)
Top Overlay:
  text "Motor Controller v2" at 1732.28,952.76 h50